# Altium PCB IGBT_Driver_Stage.PcbDoc
Units mil, origin at the board's own origin, x right, y up, seen from the top; angles counter-clockwise.
Board outline 6000 x 4000 mil, 2 copper layers (Top Layer, Bottom Layer); 50 components, 40 nets, 172 pads, 0 vias.
Unrouted connection lines stored in the file: 120.
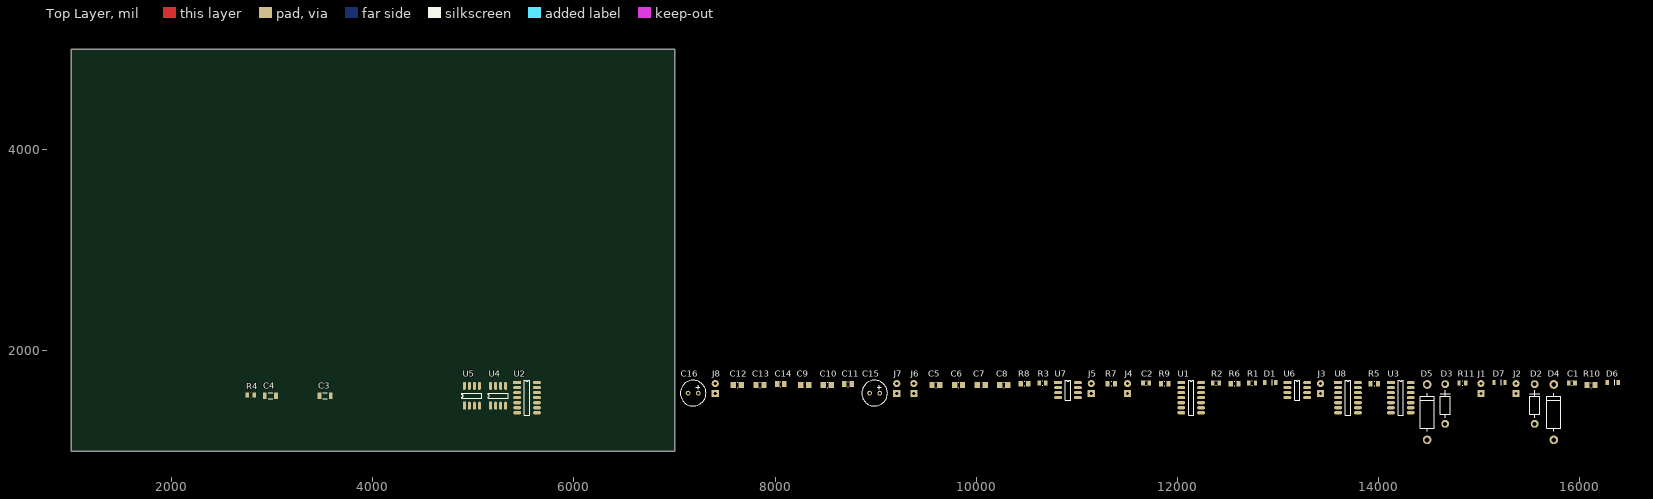
[diagram p0: Top Layer view]
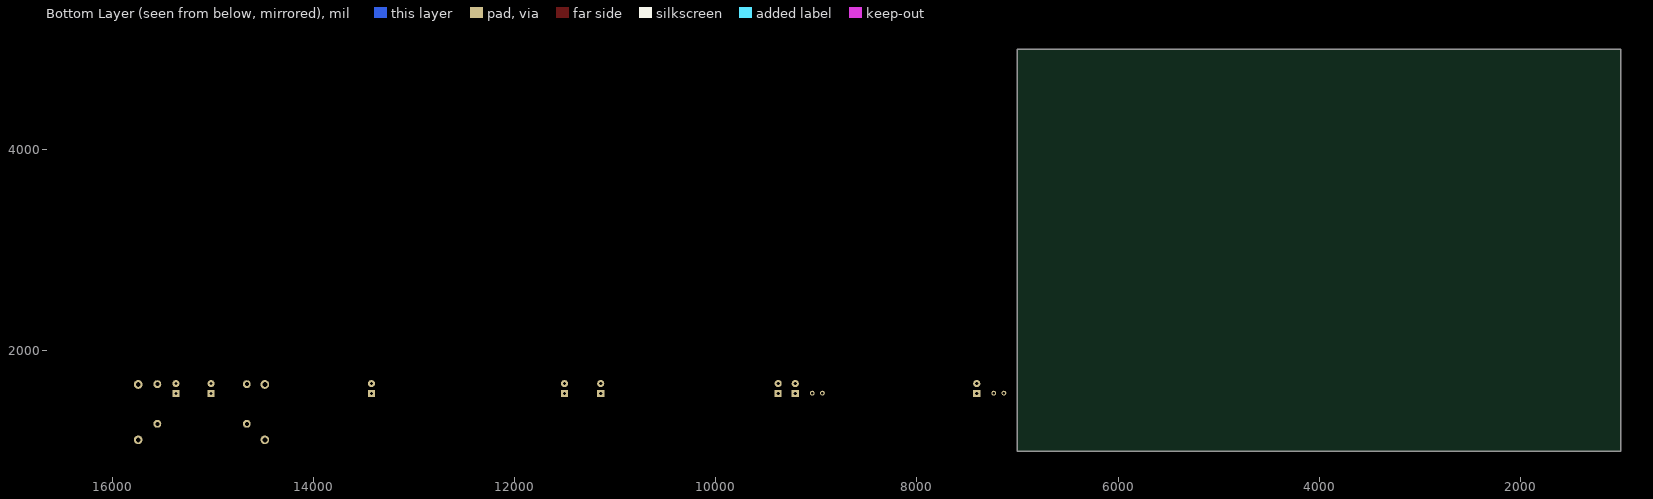
[diagram p1: Bottom Layer view, seen from below]

## Layer stack, top to bottom
Top Layer: signal copper 1.4
Dielectric: dielectric 12.6, FR-4, Dk 4.8
Bottom Layer: signal copper 1.4

## Board outline
1000,1000 7000,1000 7000,5000 1000,5000

## Design rules (kind name [scope] priority, off if disabled: settings)
Clearance [All] p1: gap=10
PolygonConnect [All] p1: connectstyle=Relief reliefconductorwidth=10 reliefentries=4 polygonreliefangle="90 Angle" airgapwidth=10
RoutingVias [All] p1: holewidth=28 width=50 viastyle="Through Hole" minholewidth=28 minwidth=50 maxholewidth=28 maxwidth=50
SolderMaskExpansion [All] p1: expansion=4
Width [All] p1: maxlimit=10 minlimit=10 preferedwidth=10
28 further rules are at their usual default settings.

## Components (designator, comment, footprint, x,y, rotation, side; value= is the part's Value field where it differs from the comment)
C1 "CAP 100nF 25V 0805(2012)" CAPC0805(2012)145_L 15925,1680 r0 top
C2 "CAP 22nF 25V 0805(2012)" CAPC0805(2012)145_L 11690,1680 r0 top
C3 "CAP 10uF 25V 1206(3216)" CAPC1206(3216)190_L 3525,1555 r0 top
C4 "CAP 10uF 25V 1206(3216)" CAPC1206(3216)190_L 2980,1555 r0 top
C5 "CAP 100nF 25V 0805(2012)" CAPC0805(2012)145_M 9600,1660 r0 top
C6 "CAP 100nF 25V 0805(2012)" CAPC0805(2012)145_M 9825,1660 r0 top
C7 "CAP 100nF 25V 0805(2012)" CAPC0805(2012)145_M 10050,1660 r0 top
C8 "CAP 100nF 25V 0805(2012)" CAPC0805(2012)145_M 10275,1660 r0 top
C9 "CAP 100nF 25V 0805(2012)" CAPC0805(2012)145_M 8295,1660 r0 top
C10 "CAP 100nF 25V 0805(2012)" CAPC0805(2012)145_M 8520,1660 r0 top
C11 "CAP 1uF 25V 0805(2012)" CAPC0805(2012)145_N 8725,1670 r0 top
C12 "CAP 100nF 25V 0805(2012)" CAPC0805(2012)145_M 7625,1660 r0 top
C13 "CAP 100nF 25V 0805(2012)" CAPC0805(2012)145_M 7850,1660 r0 top
C14 "CAP 1uF 25V 0805(2012)" CAPC0805(2012)145_N 8055,1670 r0 top
C15 "CAP" "CAP 2.5mm" 8940,1580 r0 top
C16 "CAP" "CAP 2.5mm" 7135,1580 r0 top
D1 "1N4148" 1N4148 12925,1685 r0 top
D2 "1N5819" 1N5819 15555,1275 r90 top
D3 "1N5819" 1N5819 14665,1275 r90 top
D4 "1N5337" 1N5337 15745,1115 r90 top
D5 "1N5337" 1N5337 14485,1115 r90 top
D6 "1N4148" 1N4148 16330,1685 r0 top
D7 "1N4148" 1N4148 15205,1685 r0 top
J1 "JST 2pin" "JST 2pin" 15020,1575 r0 top
J2 "JST 2pin" "JST 2pin" 15370,1575 r0 top
J3 "JST 2pin" "JST 2pin" 13425,1575 r0 top
J4 "JST 2pin" "JST 2pin" 11505,1575 r0 top
J5 "JST 2pin" "JST 2pin" 11145,1575 r0 top
J6 "JST 2pin" "JST 2pin" 9380,1575 r0 top
J7 "JST 2pin" "JST 2pin" 9210,1575 r0 top
J8 "JST 2pin" "JST 2pin" 7405,1575 r0 top
R1 "330R 5% 0805(2012)" RESC0805(2012)_L 12745,1680 r0 top
R2 "330R 5% 0805(2012)" RESC0805(2012)_L 12385,1680 r0 top
R3 "330R 5% 0805(2012)" RESC0805(2012)_L 10660,1680 r0 top
R4 "330R 5% 0805(2012)" RESC0805(2012)_L 2785,1560 r0 top
R5 "1K 5% 0805(2012)" RESC0805(2012)_N 13960,1675 r0 top
R6 "1K 5% 0805(2012)" RESC0805(2012)_N 12570,1675 r0 top
R7 "1K 5% 0805(2012)" RESC0805(2012)_N 11345,1675 r0 top
R8 "1K 5% 0805(2012)" RESC0805(2012)_N 10480,1675 r0 top
R9 "20K 1% 0805(2012)" RESC0805(2012)_N 11875,1675 r0 top
R10 "1K 1% 0805(2012)" RESC0805(2012)_M 16115,1660 r0 top
R11 "10R 5% 0805(2012)" RESC0805(2012)_L 14835,1680 r0 top
U1 "74HC14" SOP14 12040,1685 r0 top
U2 "74HC08" SOP14 5435,1685 r0 top
U3 "74HC74" SOP14 14125,1685 r0 top
U4 "MIC4422YM" SOP8 5170,1455 r90 top
U5 "MIC4422YM" SOP8 4910,1455 r90 top
U6 "MOCD207R2M" SOP8 13095,1685 r0 top
U7 "MOCD207R2M" SOP8 10815,1685 r0 top
U8 "74HC14" SOP14 13600,1685 r0 top

## Footprints (in the part's own frame and the unit in brackets; to place one, negate y for a bottom-side part, rotate by r counter-clockwise, add the part's x,y. Pads: shape width x height; smd on the part's side, far side on the other; paste and mask are expansions set on the pad)
1N4148 [mm]
  rect 0.85x1.3 smd: A(-1.4,0) K(1.4,0)
  silkscreen extent 0.5,-0.7 0.5,0.7
1N5337 [mm]
  round 2.2 hole 1.2: A(0,0) K(14,0)
  silkscreen extent 2.2,-1.75 11.8,1.75
1N5819 [mm]
  round 2 hole 1: A(0,0) K(10,0)
  silkscreen extent 1.5,-1.3 8.5,1.3
"CAP 2.5mm" [mm]
  round 1.2 hole 0.6: 1(0,0) 2(2.56,0)
  silkscreen extent -1.97,-3.25 4.53,3.25
CAPC0805(2012)145_L [mm] "Chip Capacitor, Body 2.0x1.2mm, Height 1.45mm, IPC High Density"
  rect 0.95x1.35 smd: 1(-0.8,0) 2(0.8,0)
  silkscreen extent -0.05,-0.58 0.05,0.58, body extent -1.1,-0.72 1.1,0.72, height 1.45
CAPC0805(2012)145_M [mm] "Chip Capacitor, Body 2.0x1.2mm, Height 1.45mm, IPC Low Density"
  rect 1.35x1.55 smd: 1(-1,0) 2(1,0)
  silkscreen extent -0.05,-0.67 0.05,0.67, body extent -1.1,-0.72 1.1,0.72, height 1.45
CAPC0805(2012)145_N [mm] "Chip Capacitor, Body 2.0x1.2mm, Height 1.45mm, IPC Medium Density"
  rect 1.15x1.45 smd: 1(-0.9,0) 2(0.9,0)
  silkscreen extent -0.05,-0.62 0.05,0.63, body extent -1.1,-0.72 1.1,0.73, height 1.45
CAPC1206(3216)190_L [mm] "Chip Capacitor, Body 3.2x1.6mm, Height 1.9mm, IPC High Density"
  rect 0.95x1.7 smd: 1(-1.4,0) 2(1.4,0)
  silkscreen extent -0.55,-0.75 0.55,0.75, body extent -1.7,-0.9 1.7,0.9, height 1.9
"JST 2pin" [mm]
  rect 1.8x1.8 hole 0.8: 1(0,0)
  round 1.8 hole 0.8: 2(0,2.54)
RESC0805(2012)_L [mm] "Chip Resistor, Body 2.0x1.3mm, IPC High Density"
  rect 0.85x1.3 smd: 1(-0.85,0) 2(0.85,0)
  silkscreen extent -0.05,-0.55 0.05,0.55, body extent -1.1,-0.67 1.1,0.68, height 0.7
RESC0805(2012)_M [mm] "Chip Resistor, Body 2.0x1.3mm, IPC Low Density"
  rect 1.25x1.5 smd: 1(-1.05,0) 2(1.05,0)
  silkscreen extent -0.05,-0.65 0.05,0.65, body extent -1.1,-0.67 1.1,0.67, height 0.7
RESC0805(2012)_N [mm] "Chip Resistor, Body 2.0x1.3mm, IPC Medium Density"
  rect 1.05x1.4 smd: 1(-0.95,0) 2(0.95,0)
  silkscreen extent -0.05,-0.6 0.05,0.6, body extent -1.1,-0.67 1.1,0.68, height 0.7
SOP8 [mm]
  rect 2x0.8 smd: 1(0,0)
  oval 2x0.8 smd: 2(0,-1.27) 3(0,-2.54) 4(0,-3.81) 5(5,-3.81) 6(5,-2.54) 7(5,-1.27) 8(5,0)
  silkscreen extent 1.84,-4.44 3.17,0.64
SOP14 [mm]
  rect 2x0.8 smd: 1(0,0)
  oval 2x0.8 smd: 2(0,-1.27) 3(0,-2.54) 4(0,-3.81) 5(0,-5.08) 6(0,-6.35) 7(0,-7.62) 8(5,-7.62) 9(5,-6.35) 10(5,-5.08) 11(5,-3.81) 12(5,-2.54) 13(5,-1.27) 14(5,0)
  silkscreen extent 1.84,-8.25 3.17,0.64

## Part data
C1: library part CMP-1036-04410-1, "CAP 100nF 25V ±10% 0805 (2012 Metric) Thickness 1.45mm SMD"
C2: library part CMP-1036-04050-1, "CAP 22nF 25V ±5% 0805 (2012 Metric) Thickness 1.45mm SMD"
C3 C4: library part CMP-1037-04979-1, "CAP 10uF 25V ±10% 1206 (3216 Metric) Thickness 1.9mm SMD"
C5 C6 C7 C8 C9 C10 C12 C13: library part CMP-1036-04408-1, "CAP 100nF 25V ±5% 0805 (2012 Metric) Thickness 1.45mm SMD"
C11 C14: library part CMP-1036-04752-1, "CAP 1uF 25V ±5% 0805 (2012 Metric) Thickness 1.45mm SMD"
R1 R2 R3 R4: library part CMP-1013-00062-1, "330R 0.125W 5% 0805 (2012 Metric)  SMD"
R5 R6 R7 R8: library part CMP-1013-00074-1, "1K 0.125W 5% 0805 (2012 Metric)  SMD"
R9: library part CMP-1013-00655-1, "20K 0.125W 1% 0805 (2012 Metric)  SMD"
R10: library part CMP-1013-00510-1, "1K 0.125W 1% 0805 (2012 Metric)  SMD"
R11: library part CMP-1013-00026-1, "10R 0.125W 5% 0805 (2012 Metric)  SMD"

## Nets (pads, with @x,y where several pads share a name; then routed paths per layer and width w, separated by ;. In a path a pad name is that pad's centre, name@x,y a point inside that pad or via, vN(x,y) a via of type N, cw(c..) or ccw(c..) an arc to the next point about the centre after c; other vN are vias at no path point)
+5: C5.2 C6.2 C7.2 C8.2 C16.2 D6.K J8.1 R5.2 R6.2 R7.2 R8.2 U1.14 U2.14 U3.14 U8.14
+18: C9.2 C10.2 C11.2 C12.2 C13.2 C14.2 C15.2 J7.1 U4.1 U4.8 U5.1 U5.8
GND: C2.1 C5.1 C6.1 C7.1 C8.1 C9.1 C10.1 C11.1 C12.1 C13.1 C14.1 C15.1 C16.1 D3.A D5.A D7.A J2.2 J7.2 J8.2 U1.5 U1.7 U1.13 U2.7 U3.2 U3.7 U3.11 U3.12 U4.4 U4.5 U5.4 U5.5 U6.5 U6.7 U7.5 U7.7 U8.7 U8.11 U8.13
NetC1_1: C1.1 D2.A D4.A J2.1
NetC1_2: C1.2 R10.1
NetC2_2: C2.2 D1.A R9.2 U1.3
NetC3_1: C3.1 C4.1 R11.1 U4.6 U4.7
NetC3_2: C3.2 C4.2 J1.1 R11.2
NetD1_K: D1.K R9.1 U1.2 U3.4
NetD2_K: D2.K D5.K
NetD3_K: D3.K D4.K
NetD6_A: D6.A D7.K R10.2 U1.9
NetJ1_2: J1.2 U5.6 U5.7
NetJ3_1: J3.1 R1.2
NetJ3_2: J3.2 U6.2
NetJ4_1: J4.1 R2.2
NetJ4_2: J4.2 U6.4
NetJ5_1: J5.1 R3.2
NetJ5_2: J5.2 U7.2
NetJ6_1: J6.1 R4.2
NetJ6_2: J6.2 U7.4
NetR1_1: R1.1 U6.1
NetR2_1: R2.1 U6.3
NetR3_1: R3.1 U7.1
NetR4_1: R4.1 U7.3
NetR5_1: R5.1 U6.8 U8.1
NetR6_1: R6.1 U6.6 U8.3
NetR7_1: R7.1 U7.8 U8.5
NetR8_1: R8.1 U7.6 U8.9
NetU1_1: U1.1 U2.6
NetU1_4: U1.4 U3.1
NetU1_8: U1.8 U1.11 U2.13 U3.3
NetU1_10: U1.10 U2.9
NetU2_1: U2.1 U8.2
NetU2_2: U2.2 U8.4
NetU2_3: U2.3 U2.4
NetU2_5: U2.5 U8.6
NetU2_8: U2.8 U4.2
NetU2_10: U2.10 U2.12 U3.5
NetU2_11: U2.11 U5.2
pads on no net: U1.6 U1.12 U3.6 U3.8 U3.9 U3.10 U3.13 U4.3 U5.3 U8.8 U8.10 U8.12